# Altium PCB Diff-Probe.PcbDoc
Units mm, origin at the board's own origin, x right, y up, seen from the top; angles counter-clockwise.
Board outline 78 x 28 mm, 4 copper layers (Top Layer, MidLayer1, MidLayer2, Bottom Layer), stack 1.57 mm thick; 102 components, 41 nets, 248 pads, 67 vias.
Unrouted connection lines stored in the file: 2.
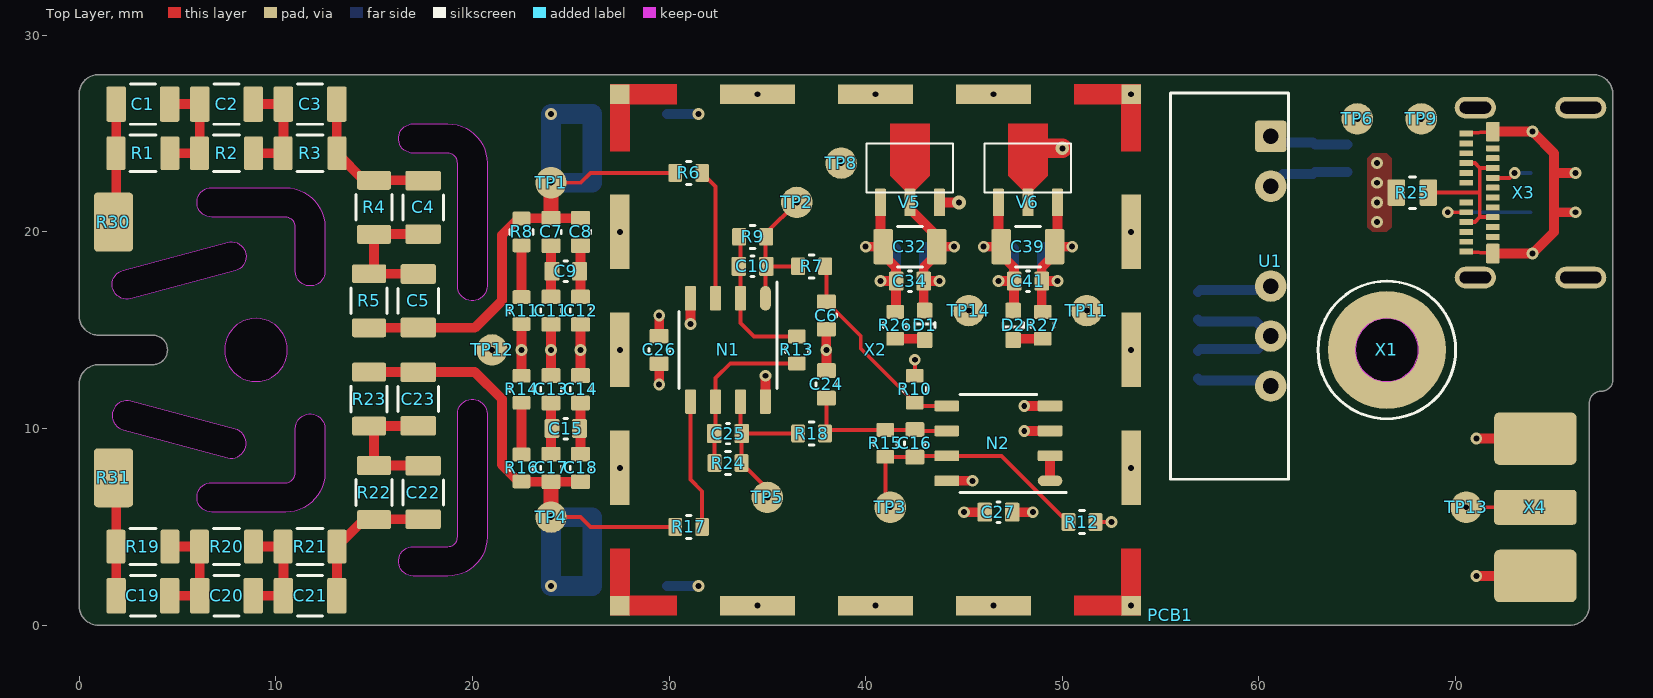
[diagram p0: Top Layer view]
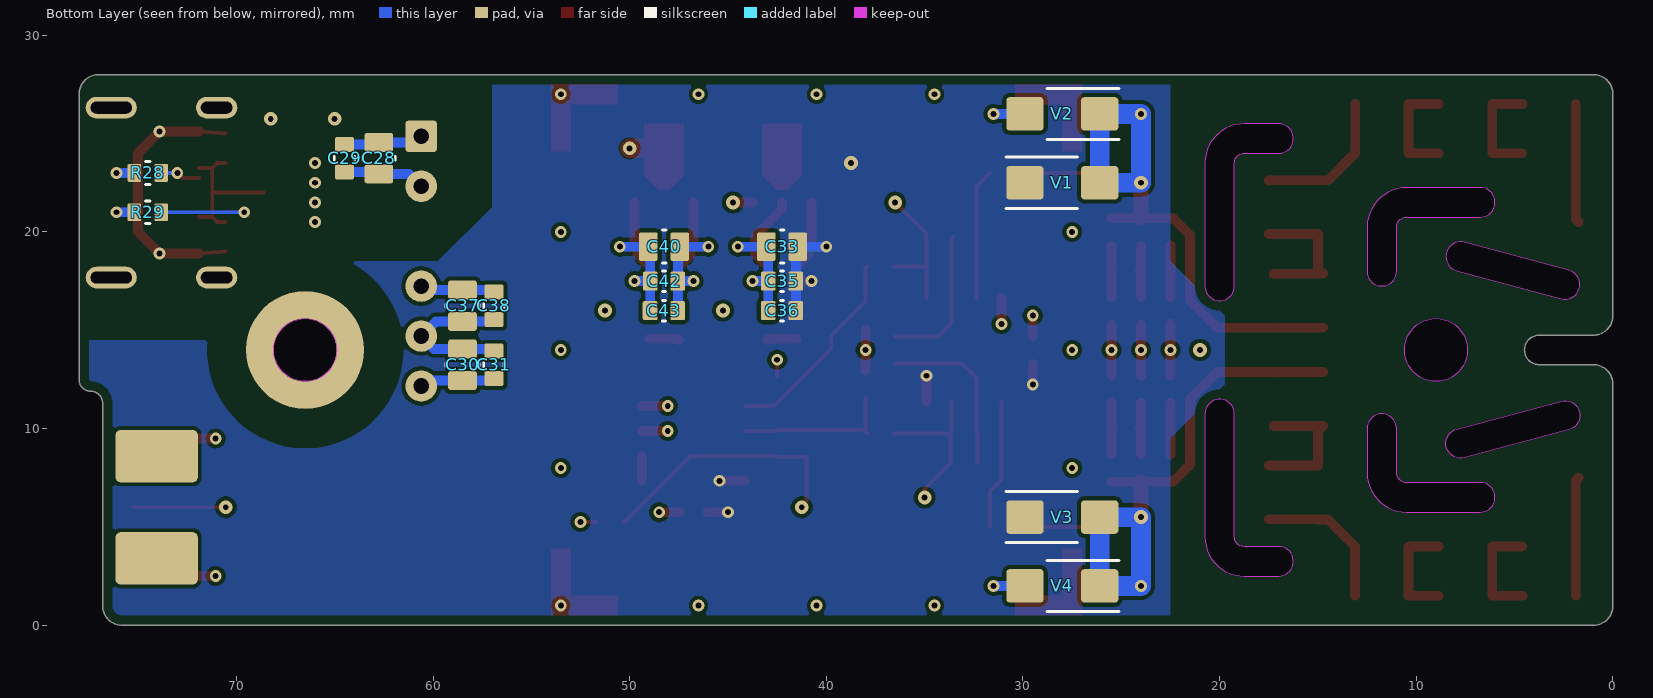
[diagram p1: Bottom Layer view, seen from below]
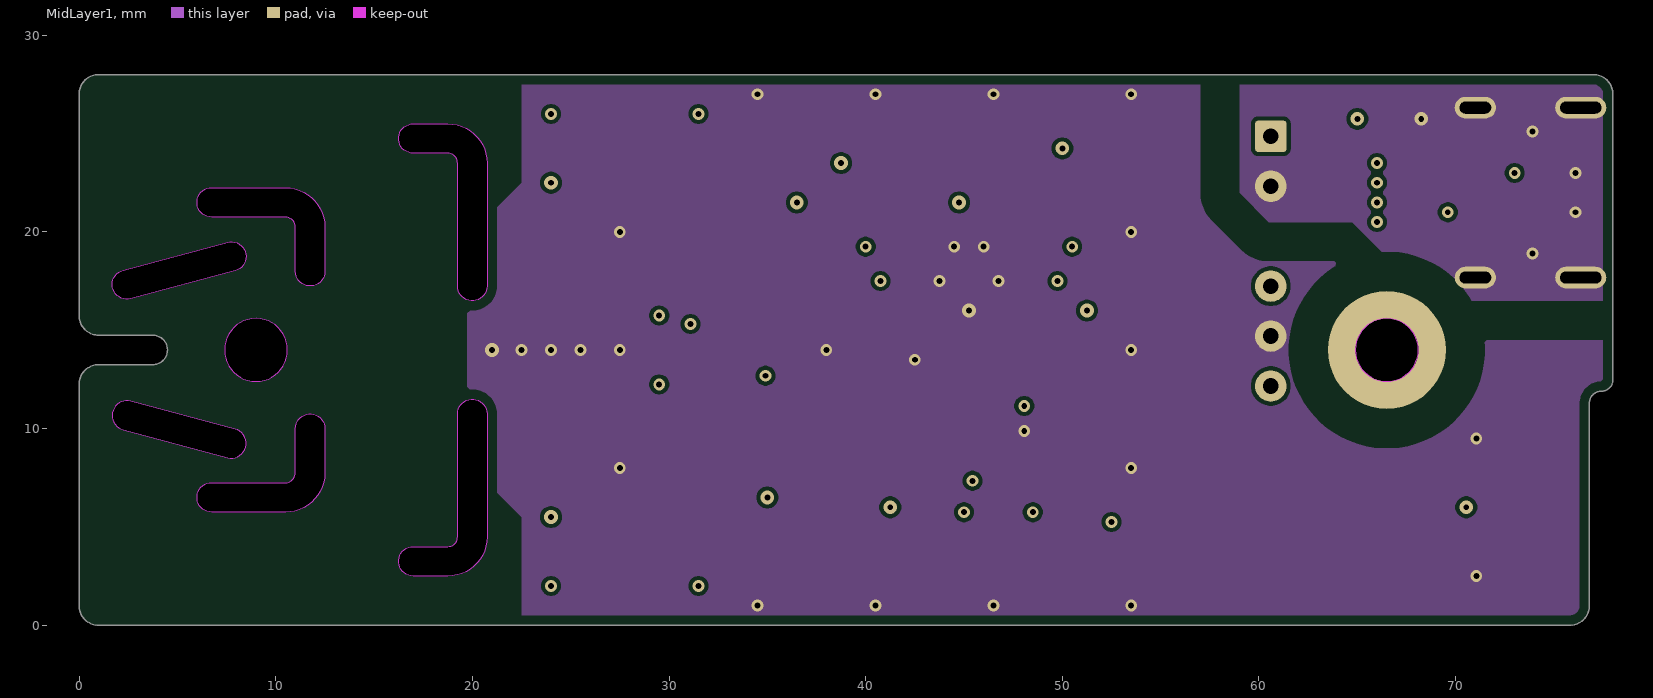
[diagram p2: MidLayer1]
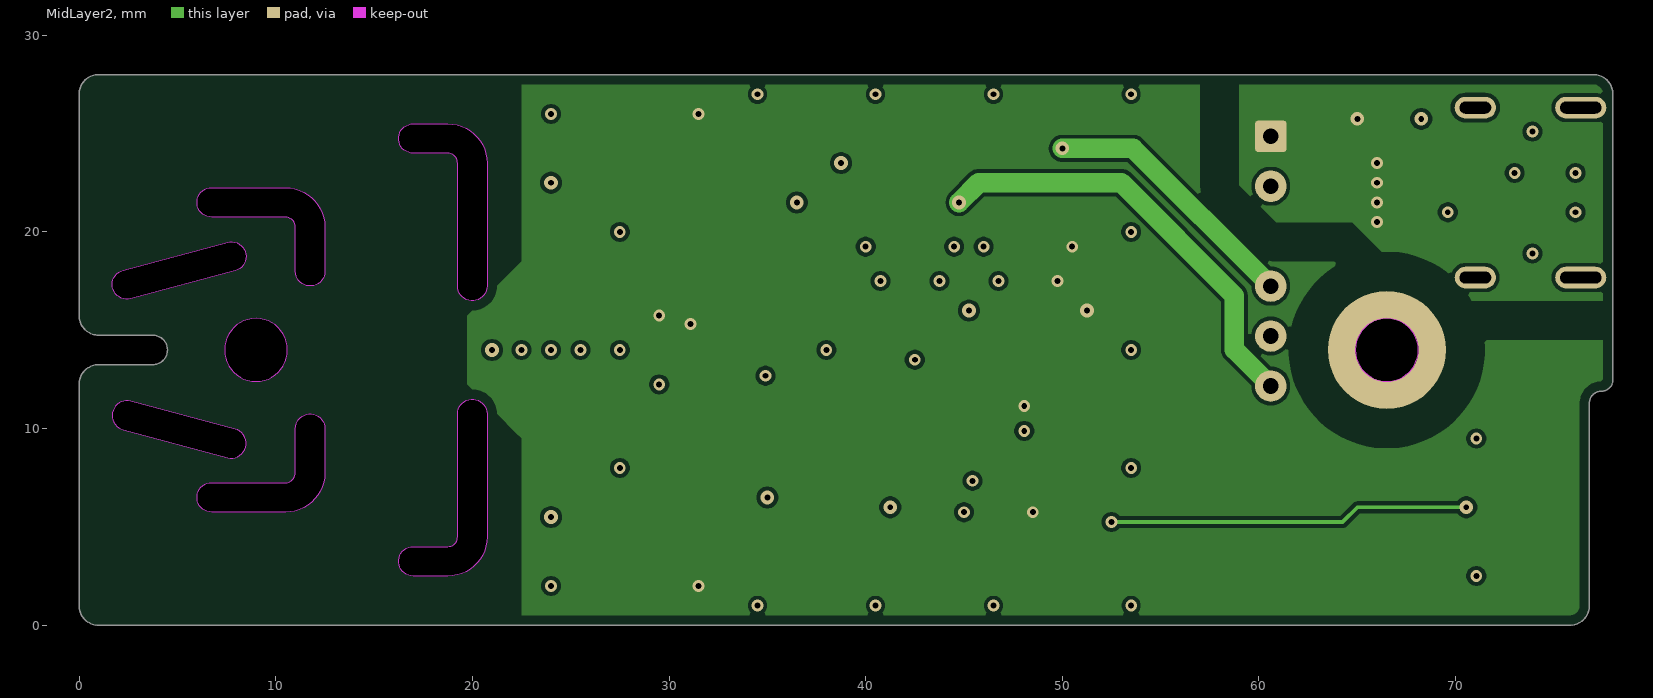
[diagram p3: MidLayer2]
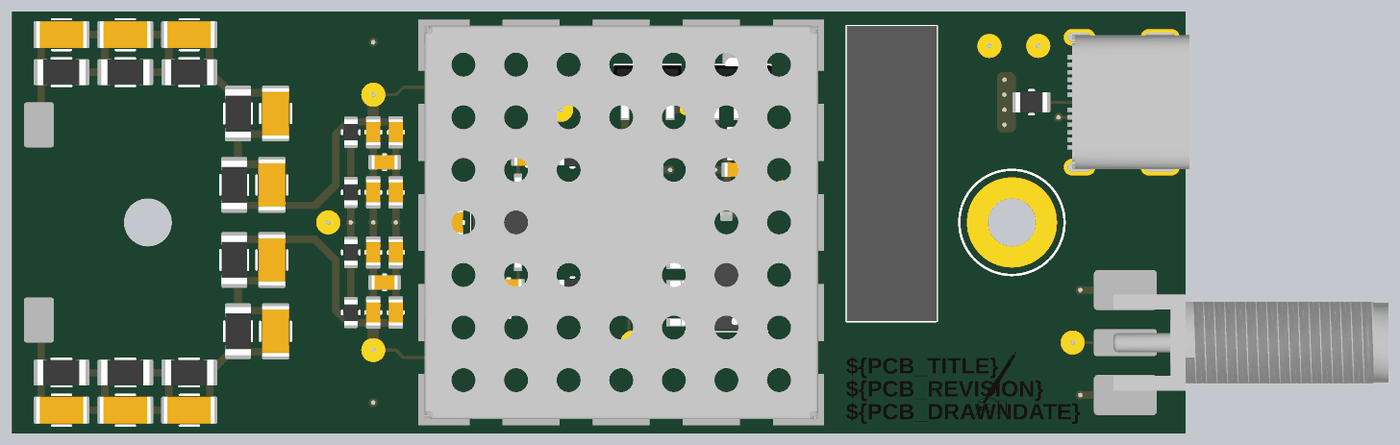
[diagram p4: 3D render of the assembled board from above, using the file's embedded part models]
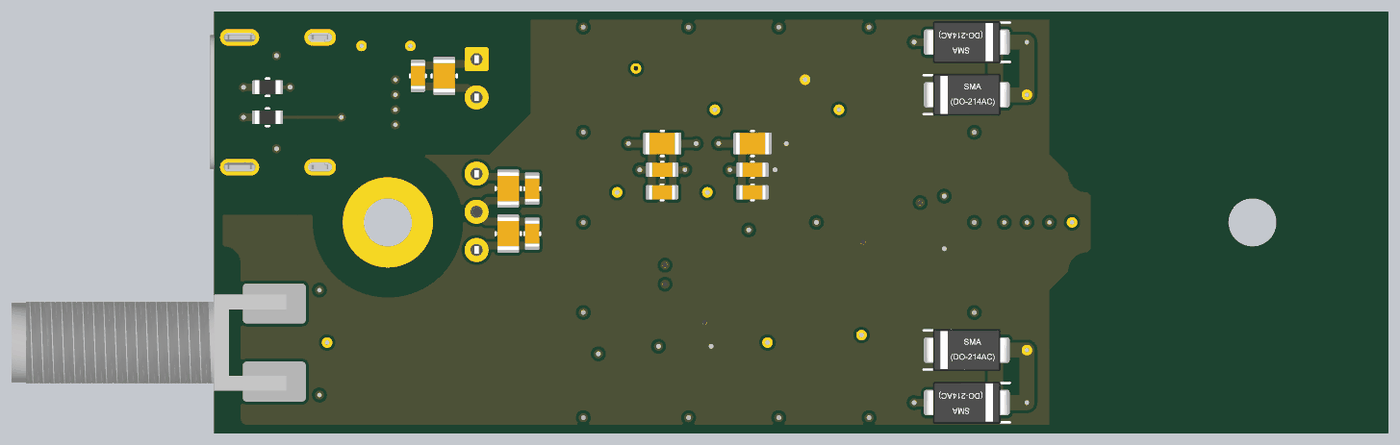
[diagram p5: 3D render of the assembled board from below, using the file's embedded part models]

## Layer stack, top to bottom
Top Solder: solder mask 0.01, Solder Resist, Dk 3.5
Top Layer: signal copper 0.035
Dielectric1: prepreg 0.18, FR-4 (7628), Dk 4.2
Dielectric 2: prepreg 0.18, FR-4 (7628), Dk 4.2
MidLayer1: signal copper 0.035
Core: core 0.71, Dk 4.2
MidLayer2: signal copper 0.035
Dielectric 3: prepreg 0.18, FR-4 (7628), Dk 4.2
Dielectric 4: prepreg 0.18, FR-4 (7628), Dk 4.2
Bottom Layer: signal copper 0.035
Bottom Solder: solder mask 0.01, Solder Resist, Dk 3.5

## Board outline
0,1 0,12.247 0,12.25 cw(c1,12.25) 1,13.25 1.003,13.25 3.75,13.25 ccw(c3.75,14) 3.75,14.75 1,14.75 cw(c1,15.75) 0,15.75 0,27 cw(c1,27) 1,28 77,28 cw(c77,27) 78,27 78,12.5 cw(c77.4,12.5) 77.4,11.9 ccw(c77.4,11.3) 76.8,11.3 76.8,1 cw(c75.8,1) 75.8,0 1.003,0 1,0 cw(c1,1)
cut-out: 7.4,14 ccw(c9,14) 9,12.4 ccw(c9,14) 10.6,14 ccw(c9,14) 9,15.6 ccw(c9,14)
cut-out: 64.9,14 ccw(c66.5,14) 66.5,12.4 ccw(c66.5,14) 68.1,14 ccw(c66.5,14) 66.5,15.6 ccw(c66.5,14)
cut-out: 17,2.5 cw(c17,3.25) 17,4 18.75,4 ccw(c18.75,4.5) 19.25,4.5 19.25,10.75 cw(c20,10.75) 20.75,10.75 20.75,4.5 cw(c18.75,4.5) 18.75,2.5
cut-out: 17,24 cw(c17,24.75) 17,25.5 18.75,25.5 cw(c18.75,23.5) 20.75,23.5 20.75,17.25 cw(c20,17.25) 19.25,17.25 19.25,23.5 ccw(c18.75,23.5) 18.75,24
cut-out: 2.632,16.602 cw(c2.437,17.326) 2.243,18.051 7.556,19.474 cw(c7.75,18.75) 7.944,18.026
cut-out: 2.243,9.949 7.556,8.526 ccw(c7.75,9.25) 7.944,9.974 2.632,11.398 ccw(c2.437,10.674)
cut-out: 6.75,5.75 cw(c6.75,6.5) 6.75,7.25 10.5,7.25 ccw(c10.5,7.75) 11,7.75 11,10 cw(c11.75,10) 12.5,10 12.5,7.75 cw(c10.5,7.75) 10.5,5.75
cut-out: 6.75,20.75 cw(c6.75,21.5) 6.75,22.25 10.5,22.25 cw(c10.5,20.25) 12.5,20.25 12.5,18 cw(c11.75,18) 11,18 11,20.25 ccw(c10.5,20.25) 10.5,20.75

## Design rules (kind name [scope] priority, off if disabled: settings)
AssemblyTestPointUsage [IsTestpoint] p1:
AssemblyTestpoint [IsTestpoint] p1: testpointundercomponent=TRUE minsize=0.8 maxsize=1.6 preferedsize=0.85 minholesize=0 maxholesize=0 preferedholesize=0 testpointgrid=0.025 usegrid=FALSE gridtolerance=0 allowsidetop=TRUE allowsidebottom=TRUE minspacing=2.54
BoardOutlineClearance [All and not OnLayer('Top Overlay')] p1: gap=0.5 ignorepadtopadclearanceinfootprint=FALSE except(0: Arc-SplitContinuation Track-SplitContinuation SMDPad-SplitContinuation Fill-SplitContinuation Poly-SplitContinuation Region-SplitContinuation Text-SplitContinuation; 1.5: THPad-SplitContinuation Via-SplitContinuation)
Clearance Clearance_Input [InNetClass('Input') vs all and not InNetClass('Input')] p1: gap=1.6 ignorepadtopadclearanceinfootprint=FALSE except(0: Arc-Hole Track-Hole SMDPad-Hole THPad-Hole Via-Hole Fill-Hole Poly-Hole Region-Hole Text-Hole)
Clearance Clearance_USB_Power [(InNetClass('Supply') or HasFootprint('A-MountingHole-0600x0600_0320')) and not HasFootprint('105450-0101') vs all and not InNetClass('Supply') and not HasFootprint('105450-0101')] p2: gap=2 ignorepadtopadclearanceinfootprint=FALSE
Clearance Clearance2Holes [not OnTopLayer AND NOT OnBottomLayer vs (ObjectKind = 'Pad') And (Layer = 'MultiLayer') And (PadIsPlated = 'False')] p3: gap=0.5 ignorepadtopadclearanceinfootprint=FALSE except(0: Arc-Hole Track-Hole SMDPad-Hole THPad-Hole Via-Hole Fill-Hole Poly-Hole Region-Hole Text-Hole)
Clearance Clearance_via2via [IsVia vs IsVia] p4: gap=0.15 ignorepadtopadclearanceinfootprint=FALSE
Clearance [All] p5: gap=0.2 ignorepadtopadclearanceinfootprint=FALSE except(0: Arc-Hole Track-Hole SMDPad-Hole THPad-Hole Via-Hole Fill-Hole Poly-Hole Region-Hole Text-Hole)
ComponentClearance [IsComponent] p1: gap=0.254 collisioncheckmode=3 verticalgap=0.254 showdistances=TRUE donotcheckwithout3dbody=TRUE
FabricationTestPointUsage [IsTestpoint] p1: valid=0 allowmultiple=FALSE
FabricationTestpoint [IsTestpoint] p1: side=3 testpointundercomponent=TRUE minsize=0.8 maxsize=1.6 preferedsize=0.85 minholesize=0 maxholesize=0 preferedholesize=0 testpointgrid=0.025 allowsidetop=TRUE allowsidebottom=TRUE usegrid=FALSE gridtolerance=0 minspacing=2.54 boardedgeclearance=1.9
HoleSize [All] p1: absolutevalues=TRUE maxlimit=6.4 minlimit=0.2 maxpercent=80.000 minpercent=20.000
MinimumAnnularRing MinimumAnnularRingVia [IsVia] p1: minimumring=0.15
MinimumAnnularRing MinimumAnnularRingDefault [All] p2: minimumring=0.15
MinimumSolderMaskSliver MinimumSolderMaskSliver_Symbols [IsComponent] p1: minsoldermaskwidth=0
MinimumSolderMaskSliver [All and not HasFootprint('105450-0101')] p2: minsoldermaskwidth=0.1
PlaneClearance PlaneClearance_PE [InNet('EARTH_USB')  or InNet('EARTH_G2') or InNet('NetC3_2') or InNet('EARTH')] p1: clearance=1
PlaneClearance PlaneClearance_Holes-via [(IsVia)] p2: clearance=0.35
PlaneClearance PlaneClearance_Holes-Special [(InComponentClass('SpecialConnector'))] p3: clearance=0.35
PlaneClearance [All] p4: clearance=0.5
PlaneConnect "PlaneConnect_Special Con" [(InComponentClass('SpecialConnector'))] p1: planeconnectstyle=Direct reliefexpansion=0.508 reliefentries=4 reliefconductorwidth=0.254 reliefairgap=0.254
PlaneConnect PlaneConnect_Components [(InComponentClass('All Components'))] p2: planeconnectstyle=Relief reliefexpansion=0.35 reliefentries=4 reliefconductorwidth=0.25 reliefairgap=0.25
PlaneConnect [All] p3: planeconnectstyle=Direct reliefexpansion=0.508 reliefentries=4 reliefconductorwidth=0.254 reliefairgap=0.254
PolygonConnect PolygonConnect_Components [HasFootprint('5-1814400-2')] p1: connectstyle=Relief reliefconductorwidth=0.254 reliefentries=4 polygonreliefangle="90 Angle" airgapwidth=0.254
PolygonConnect [All] p2: connectstyle=Direct reliefconductorwidth=0.254 reliefentries=4 polygonreliefangle="90 Angle" airgapwidth=0.254
RoutingVias Micro-Vias [((ObjectKind = 'Via') AND (StartLayer = 'Top Layer') AND (StopLayer = 'InternalPlane1')) OR ((ObjectKind = 'Via') AND (StartLayer = 'Bottom Layer') AND (StopLayer = 'InternalPlane2'))] p1: holewidth=0.15 width=0.35 viastyle="Through Hole" minholewidth=0.15 minwidth=0.35 maxholewidth=0.15 maxwidth=0.35
RoutingVias [All] p2: holewidth=0.2 width=0.55 viastyle="Through Hole" minholewidth=0.2 minwidth=0.55 maxholewidth=0.3 maxwidth=0.7
SilkToSilkClearance [All] p1: silktosilkclearance=0.2
SilkToSolderMaskClearance SilkToPadClearance [IsPad] p1: minsilkscreentomaskgap=0.2 clearancetoexposedcopper=TRUE
SolderMaskExpansion SolderMaskExpansionVias [IsVia] p1: expansion=0.15 istentingtop=FALSE soldermaskfromhole=TRUE
SolderMaskExpansion SolderMaskExpansionHoles [(ObjectKind = 'Pad') And (PadIsPlated = 'False') And (AsMM(PadXSize_AllLayers) = 0) And (AsMM(PadYSize_AllLayers) = 0)] p2: expansion=0.05 istentingtop=FALSE soldermaskfromhole=TRUE
SolderMaskExpansion SolderMaskExpansionSTD [IsPad  Or IsRegion] p3: expansion=0.05 istentingtop=FALSE
ViasUnderSMD ViasUnderSMD_TP [HasFootprint('TP_1.0mm') or HasFootprint('TP_1.6mm_via') or HasFootprint('BMI-S-103')] p1: allowed=TRUE
ViasUnderSMD [All] p2: allowed=FALSE
Width [All] p1: maxlimit=2 minlimit=0.15 preferedwidth=0.2 minimp=50.000000 maximp=50.000000 favimp=50.000000
19 further rules are at their usual default settings.

## Classes and differential pairs
component class Symbol: PCB1
net class Business-End: NetC1_1 NetC1_2 NetC2_2 NetC3_2 NetC4_2 NetC19_1 NetC19_2 NetC20_2 NetC21_2 NetC22_2
net class Supply: 5V_USB 5Vin GND_USB NetR28_2 NetR29_2 NetX3_A2 NetX3_A3 NetX3_A6 NetX3_A7 NetX3_A8 NetX3_A10 NetX3_A11 NetX3_B2 NetX3_B3 NetX3_B6 NetX3_B7 NetX3_B8 NetX3_B10 NetX3_B11
component class "Surface_Assy ": X2
component class Through-Hole_Assy: U1 X3 X4
component class Testpoint: R30 R31 TP1 TP2 TP3 TP4 TP5 TP6 TP8 TP9 TP11 TP12 TP13 TP14 X1
component class Surface_Assy: C1 C2 C3 C4 C5 C6 C7 C8 C9 C10 C11 C12 C13 C14 C15 C16 C17 C18 C19 C20 C21 C22 C23 C24 C25 C26 C27 C28 C29 C30 C31 C32 C33 C34 C35 C36 C37 C38 C39 C40 C41 C42 C43 D1 D2 N1 N2 R1 R2 R3 R4 R5 R6 R7 R8 R9 R10 R11 R12 R13 R14 R15 R16 R17 R18 R19 R20 R21 R22 R23 R24 R25 R26 R27 R28 R29 V1 V2 V3 V4 V5 V6
component class Diff-Probe-Supply: C28 C29 C30 C31 C32 C33 C34 C35 C36 C37 C38 C39 C40 C41 C42 C43 D1 D2 R25 R26 R27 R28 R29 TP6 TP8 TP9 TP11 TP14 U1 V5 V6 X3

## Components (designator, comment, footprint, x,y, rotation, side; value= is the part's Value field where it differs from the comment)
C1 "CAP 10PF 1KV U2J 1206" C-1206_3216_100_L_RF 3.25,26.5 r0 top value=10pF
C2 "CAP 10PF 1KV U2J 1206" C-1206_3216_100_L_RF 7.5,26.5 r0 top value=10pF
C3 "CAP 10PF 1KV U2J 1206" C-1206_3216_100_L_RF 11.75,26.5 r0 top value=10pF
C4 "CAP 10PF 1KV U2J 1206" C-1206_3216_100_L_RF 17.5,21.25 r270 top value=10pF
C5 "CAP 10PF 1KV U2J 1206" C-1206_3216_100_L_RF 17.25,16.5 r270 top value=10pF
C6 "Cap 1n 0603" C-0603_1608_100_L_RF 38,15.75 r90 top value=1nF
C7 "Cap 10p 0603" C-0603_1608_095_L_RF 24,20 r90 top value=10pF
C8 "Cap 470p 0603" C-0603_1608_095_L_RF 25.5,20 r90 top value=470pF
C9 "Cap 0603" C-0603_1608_095_L_RF 24.75,18 r180 top
C10 "Cap 22p 0603" C-0603_1608_095_L_RF 34.25,18.25 r0 top value=22pF
C11 "Cap 10p 0603" C-0603_1608_095_L_RF 24,16 r90 top value=10pF
C12 "Cap 330p 0603" C-0603_1608_095_L_RF 25.5,16 r90 top value=330pF
C13 "Cap 10p 0603" C-0603_1608_095_L_RF 24,12 r90 top value=10pF
C14 "Cap 330p 0603" C-0603_1608_095_L_RF 25.5,12 r90 top value=330pF
C15 "Cap 0603" C-0603_1608_095_L_RF 24.75,10 r180 top
C16 "Cap 22p 0603" C-0603_1608_095_L_RF 42.5,9.25 r270 top value=22pF
C17 "Cap 10p 0603" C-0603_1608_095_L_RF 24,8 r90 top value=10pF
C18 "Cap 470p 0603" C-0603_1608_095_L_RF 25.5,8 r90 top value=470pF
C19 "CAP 10PF 1KV U2J 1206" C-1206_3216_100_L_RF 3.25,1.5 r0 top value=10pF
C20 "CAP 10PF 1KV U2J 1206" C-1206_3216_100_L_RF 7.5,1.5 r0 top value=10pF
C21 "CAP 10PF 1KV U2J 1206" C-1206_3216_100_L_RF 11.75,1.5 r0 top value=10pF
C22 "CAP 10PF 1KV U2J 1206" C-1206_3216_100_L_RF 17.5,6.75 r90 top value=10pF
C23 "CAP 10PF 1KV U2J 1206" C-1206_3216_100_L_RF 17.25,11.5 r90 top value=10pF
C24 "Cap 1n 0603" C-0603_1608_100_L_RF 38,12.25 r270 top value=1nF
C25 "Cap 22p 0603" C-0603_1608_095_L_RF 33,9.75 r0 top value=22pF
C26 "Cap 100n 0603" C-0603_1608_095_L_RF 29.5,14 r270 top value=100nF
C27 "Cap 100n 0603" C-0603_1608_095_L_RF 46.75,5.75 r180 top value=100nF
C28 "Cap 10u 0805" C-0805_2012_155_L_RF 62.75,23.75 r90 bottom value=10µF
C29 "Cap 100n 0603" C-0603_1608_095_L_RF 64.5,23.75 r90 bottom value=100nF
C30 "Cap 10u 0805" C-0805_2012_155_L_RF 58.5,13.25 r270 bottom value=10µF
C31 "Cap 100n 0603" C-0603_1608_095_L_RF 56.9,13.25 r270 bottom value=100nF
C32 "Cap 100u 6.3V 1206" C-1206_3216_180_L_RF 42.25,19.25 r0 top value=100µF
C33 "Cap 10u 0805" C-0805_2012_155_L_RF 42.25,19.25 r180 bottom value=10µF
C34 "Cap 100n 0603" C-0603_1608_095_L_RF 42.25,17.5 r180 top value=100nF
C35 "Cap 1n 0603" C-0603_1608_100_L_RF 42.25,17.5 r180 bottom value=1nF
C36 "Cap 100p 0603" C-0603_1608_095_L_RF 42.25,16 r180 bottom value=100pF
C37 "Cap 10u 0805" C-0805_2012_155_L_RF 58.5,16.25 r270 bottom value=10µF
C38 "Cap 100n 0603" C-0603_1608_095_L_RF 56.9,16.25 r270 bottom value=100nF
C39 "Cap 100u 6.3V 1206" C-1206_3216_180_L_RF 48.25,19.25 r0 top value=100µF
C40 "Cap 10u 0805" C-0805_2012_155_L_RF 48.25,19.25 r180 bottom value=10µF
C41 "Cap 100n 0603" C-0603_1608_095_L_RF 48.25,17.5 r180 top value=100nF
C42 "Cap 1n 0603" C-0603_1608_100_L_RF 48.25,17.5 r180 bottom value=1nF
C43 "Cap 100p 0603" C-0603_1608_095_L_RF 48.26,16 r180 bottom value=100pF
D1 "LED SMD 0603 Green" LED-0603_1608_Green_L_RF 43,15.25 r90 top value=green
D2 "LED SMD 0603 Green" LED-0603_1608_Green_L_RF 47.5,15.25 r270 top value=green
N1 "TL072ID" SO8_L_RF 33,14 r180 top
N2 "TL072ID" SO8_L_RF 46.75,9.25 r90 top
PCB1 "PCB_Dummy" Dummy_PCB-Parameter_SM 55.5,0.5 r0 top value="- / A"
R1 "Res 1M 1206" R-1206_3216_065_L_RF 3.25,24 r0 top value=1M
R2 "Res 1M 1206" R-1206_3216_065_L_RF 7.5,24 r0 top value=1M
R3 "Res 1M 1206" R-1206_3216_065_L_RF 11.75,24 r0 top value=1M
R4 "Res 1M 1206" R-1206_3216_065_L_RF 15,21.25 r270 top value=1M
R5 "Res 1M 1206" R-1206_3216_065_L_RF 14.75,16.5 r270 top value=1M
R6 "Res 100R 0603" R-0603_1608_050_L_RF 31,23 r0 top value=100
R7 "Res 1k 0603" R-0603_1608_050_L_RF 37.25,18.25 r0 top value=1k
R8 "Res 47k 0603" R-0603_1608_050_L_RF 22.5,20 r90 top value=47k
R9 "Res 1k 0603" R-0603_1608_050_L_RF 34.25,19.75 r0 top value=1k
R10 "Res 1k 0603" R-0603_1608_050_L_RF 42.5,12 r90 top value=1k
R11 "Res 3k3 0603" R-0603_1608_050_L_RF 22.5,16 r90 top value=3.3k
R12 "Res 47R 0603" R-0603_1608_050_L_RF 51,5.25 r0 top value=47
R13 "Res 0603" R-0603_1608_050_L_RF 36.5,14 r90 top
R14 "Res 3k3 0603" R-0603_1608_050_L_RF 22.5,12 r90 top value=3.3k
R15 "Res 1k 0603" R-0603_1608_050_L_RF 41,9.25 r270 top value=1k
R16 "Res 47k 0603" R-0603_1608_050_L_RF 22.5,8 r90 top value=47k
R17 "Res 100R 0603" R-0603_1608_050_L_RF 31,5 r0 top value=100
R18 "Res 1k 0603" R-0603_1608_050_L_RF 37.25,9.75 r0 top value=1k
R19 "Res 1M 1206" R-1206_3216_065_L_RF 3.25,4 r0 top value=1M
R20 "Res 1M 1206" R-1206_3216_065_L_RF 7.5,4 r0 top value=1M
R21 "Res 1M 1206" R-1206_3216_065_L_RF 11.75,4 r0 top value=1M
R22 "Res 1M 1206" R-1206_3216_065_L_RF 15,6.75 r90 top value=1M
R23 "Res 1M 1206" R-1206_3216_065_L_RF 14.75,11.5 r90 top value=1M
R24 "Res 1k 0603" R-0603_1608_050_L_RF 33,8.25 r0 top value=1k
R25 "Res 0R 0805" R-0805_2012_060_L_RF 67.8,22 r180 top value=0R
R26 "Res 1k 0603" R-0603_1608_050_L_RF 41.5,15.25 r90 top value=1k
R27 "Res 1k 0603" R-0603_1608_050_L_RF 49,15.25 r270 top value=1k
R28 "Res 5k1 0603" R-0603_1608_050_L_RF 74.5,23 r180 bottom value=5.1k
R29 "Res 5k1 0603" R-0603_1608_050_L_RF 74.5,21 r180 bottom value=5.1k
R30 "" Lötpad_2x3 1.75,20.5 r0 top
R31 "" Lötpad_2x3 1.75,7.5 r0 top
TP1 "TestPoint 1.6mm with via" TP_1.6mm_via 24,22.5 r0 top value=TP
TP2 "TestPoint 1.6mm with via" TP_1.6mm_via 36.5,21.5 r0 top value=TP
TP3 "TestPoint 1.6mm with via" TP_1.6mm_via 41.25,6 r0 top value=TP
TP4 "TestPoint 1.6mm with via" TP_1.6mm_via 24,5.5 r0 top value=TP
TP5 "TestPoint 1.6mm with via" TP_1.6mm_via 35,6.5 r0 top value=TP
TP6 "TestPoint 1.6mm with via" TP_1.6mm_via 65,25.75 r0 top value=TP
TP8 "TestPoint 1.6mm with via" TP_1.6mm_via 38.75,23.5 r0 top value=TP
TP9 "TestPoint 1.6mm with via" TP_1.6mm_via 68.25,25.75 r0 top value=TP
TP11 "TestPoint 1.6mm with via" TP_1.6mm_via 51.25,16 r0 top value=TP
TP12 "TestPoint 1.6mm with via" TP_1.6mm_via 21,14 r0 top value=TP
TP13 "TestPoint 1.6mm with via" TP_1.6mm_via 70.54,6 r90 top value=TP
TP14 "TestPoint 1.6mm with via" TP_1.6mm_via 45.25,16 r0 top value=TP
U1 "IA0509S" SIP7 58.5,17.25 r270 top
V1 "SS14-E3" SMA_DO214AC_L_RF 28,22.5 r0 bottom value=40V
V2 "SS14-E3" SMA_DO214AC_L_RF 28,26 r180 bottom value=40V
V3 "SS14-E3" SMA_DO214AC_L_RF 28,5.5 r0 bottom value=40V
V4 "SS14-E3" SMA_DO214AC_L_RF 28,2 r180 bottom value=40V
V5 "L78L05" SOT-89-3 42.25,23 r0 top
V6 "L79L05" SOT-89-3 48.25,23 r0 top
X1 "AnschlussPad_D3.2_P6mm" A-MountingHole-0600x0600_0320 66.5,14 r0 top
X2 "BMI-S-103" BMI-S-103 40.5,14 r0 top locked
X3 "105450-0101" 105450-0101 71,22 r90 top locked
X4 "73251-2120" 73251-2120 74.05,6 r270 top

## Footprints (in the part's own frame and the unit in brackets; to place one, negate y for a bottom-side part, rotate by r counter-clockwise, add the part's x,y. Pads: shape width x height; smd on the part's side, far side on the other; paste and mask are expansions set on the pad)
73251-2120 [mm] "SMA Connector"
  rrect20% 1.78x4.19 smd: 1(0,0)
  rrect20% 2.665x4.19 smd: 2(-3.492,0) 2(3.492,0)
  rrect20% 2.665x4.19 smd far side: 2(-2.6,0) 2(2.6,0)
  body extent -3.2,-0.8 3.2,17.5, height 3.9
105450-0101 [mm] "USB-C Connector"
  rrect20% 0.3x0.7 smd: A1(-3,0.46) A2(-2.5,0.46) A3(-2,0.46) A4(-1.5,0.46) A5(-1,0.46) A6(-0.5,0.46) A7(0.5,0.46) A8(1,0.46) A9(1.5,0.46) A10(2,0.46) A11(2.5,0.46) A12(3,0.46) B2(2.25,-0.89) B3(1.75,-0.89) B4(1.25,-0.89) B5(0.75,-0.89) B6(0.25,-0.89) B7(-0.25,-0.89) B8(-0.75,-0.89) B9(-1.25,-0.89) B10(-1.75,-0.89) B11(-2.25,-0.89)
  rrect20% 1x0.7 smd: B1(3.1,-0.89) B12(-3.1,-0.89)
  oval 1.1x2.6 hole 0.6 slot 2.1 at 90 deg: S(-4.32,-5.36) S(4.32,-5.36)
  oval 1.1x2.1 hole 0.6 slot 1.6 at 90 deg: S(-4.32,0) S(4.32,0)
  body extent -4.47,-7.3 4.47,0.6, height 3.18
A-MountingHole-0600x0600_0320 [mm] "MountigHole"
  round 6 hole 3.2: 1(0,0)
  silkscreen extent -3.5,-3.5 3.5,3.5
BMI-S-103 [mm] "EMI Shield"
  rect 1x1 smd: S(-13,-13) S(-13,13) S(13,-13) S(13,13)
  rect 1x3.79 smd: S(-13,-6) S(-13,0) S(-13,6) S(13,-6) S(13,0) S(13,6)
  rect 3.79x1 smd: S(-6,-13) S(-6,13) S(0,-13) S(0,13) S(6,-13) S(6,13)
  Top Layer region: -13.5,13.5 -10.1,13.5 -10.1,12.5 -12.5,12.5 -12.5,10.1 -13.5,10.1
  Top Layer region: -13.5,-13.5 -13.5,-10.1 -12.5,-10.1 -12.5,-12.5 -10.1,-12.5 -10.1,-13.5
  Top Layer region: 13.5,-13.5 10.1,-13.5 10.1,-12.5 12.5,-12.5 12.5,-10.1 13.5,-10.1
  Top Layer region: 13.5,13.5 13.5,10.1 12.5,10.1 12.5,12.5 10.1,12.5 10.1,13.5
  body extent -13.11,-13.11 13.11,13.11, height 5.1
C-0603_1608_095_L_RF [mm] "Capacitor Chip 0603 Reflow; IPC7351C; Least; A.0"
  rrect20% 0.75x0.96 smd: 1(-0.7,0) 2(0.7,0)
  silkscreen extent -0.08,-0.52 0.08,0.52, body extent -0.87,-0.48 0.88,0.48, height 0.95
C-0603_1608_100_L_RF [mm] "Capacitor Chip 0603 Reflow; IPC7351C; Least; A.0"
  rrect20% 0.75x0.96 smd: 1(-0.7,0) 2(0.7,0)
  silkscreen extent -0.08,-0.52 0.08,0.52, body extent -0.87,-0.48 0.88,0.48, height 1
C-0805_2012_155_L_RF [mm] "Capacitor Chip 0805 Reflow; IPC7351C; Least; A.0"
  rrect20% 0.95x1.45 smd: 1(-0.8,0) 2(0.8,0)
  silkscreen extent -0.09,-0.83 0.09,0.84, body extent -1.1,-0.72 1.11,0.73, height 1.55
C-1206_3216_100_L_RF [mm] "Capacitor Chip 1206 Reflow; IPC7351C; Least; A.1"
  rrect20% 1x1.8 smd: 1(-1.36,0) 2(1.36,0)
  silkscreen extent -0.63,-1.02 0.63,1.02, body extent -1.7,-0.9 1.7,0.9, height 1
C-1206_3216_180_L_RF [mm] "Capacitor Chip 1206 Reflow; IPC7351C; Least; A.1"
  rrect20% 1x1.8 smd: 1(-1.36,0) 2(1.36,0)
  silkscreen extent -0.63,-1.02 0.63,1.02, body extent -1.7,-0.9 1.7,0.9, height 1.8
Dummy_PCB-Parameter_SM [mm] "Footprint of PCB Dummy Symbol"
LED-0603_1608_Green_L_RF [mm] "LED Chip 0603 Reflow_Green, LTST-C190KGKT"
  rrect20% 0.8x0.8 smd: 1(-0.75,0) 2(0.75,0)
  silkscreen extent -0.14,-0.52 0.14,0.52, body extent -0.81,-0.4 0.81,0.4, height 0.75
Lötpad_2x3 [mm]
  rrect20% 2x3 smd: 1(0,0)
R-0603_1608_050_L_RF [mm] "Resistor Chip 0603 Reflow; IPC7351C; Least; A.1"
  rrect20% 0.7x0.9 smd: 1(-0.685,0) 2(0.685,0)
  silkscreen extent -0.12,-0.58 0.12,0.58, body extent -0.85,-0.45 0.85,0.45, height 0.5
R-0805_2012_060_L_RF [mm] "Resistor Chip 0805 Reflow; IPC7351C; Least; A.1"
  rrect20% 0.89x1.35 smd: 1(-0.815,0) 2(0.815,0)
  silkscreen extent -0.16,-0.8 0.16,0.8, body extent -1.05,-0.67 1.05,0.68, height 0.6
R-1206_3216_065_L_RF [mm] "Resistor Chip 1206 Reflow; IPC7351C; Least; A.1"
  rrect20% 0.96x1.72 smd: 1(-1.375,0) 2(1.375,0)
  silkscreen extent -0.65,-0.92 0.65,0.92, body extent -1.6,-0.85 1.6,0.85, height 0.65
SIP7 [mm] "7 PIN SIP Package"
  rrect20% 1.6x1.6 hole 0.8: 1(-7.615,2.1)
  round 1.6 hole 0.8: 2(-5.075,2.1) 4(0.005,2.1) 5(2.545,2.1) 6(5.085,2.1)
  silkscreen extent -9.83,-3 9.83,3, body extent -9.83,-3 9.83,3, height 10.16
SMA_DO214AC_L_RF [mm]
  rrect20% 1.9x1.7 smd: 1(-1.9,0) 2(1.9,0)
  silkscreen extent -0.77,-1.31 2.87,1.3, body extent -2.75,-1.4 2.75,1.4, height 2.6
SO8_L_RF [mm] "SOIC, 8-Leads, Body 4.89x3.90mm, Pitch 1.27mm, IPC High Density"
  oval 0.55x1.25 smd: 1(-1.905,-2.625)
  rrect20% 0.55x1.25 smd: 2(-0.635,-2.625) 3(0.635,-2.625) 4(1.905,-2.625) 5(1.905,2.625) 6(0.635,2.625) 7(-0.635,2.625) 8(-1.905,2.625)
  silkscreen extent -2.49,-3.45 2.49,1.95, body extent -2.5,-3 2.5,3, height 1.75
SOT-89-3 [mm]
  rrect20% 0.57x1.4 smd: 1(-1.5,-1.5) 2(0,-1.5) 3(1.5,-1.5)
  Top Layer region: -0.285,-0.857 -1,-0.142 -1,2.5 1,2.5 1,-0.142 0.285,-0.857
  silkscreen extent -2.2,-1 2.2,1.5, body extent -2.25,-2.05 2.25,1.95, height 1.6
TP_1.6mm_via [mm] "Testpoint 1.6mm with via v70h30"
  round 1.6 smd paste-1: 1(0,0)

## Part data
C1 C2 C3 C4 C5 C19 C20 C21 C22 C23: library part CMP-00003-1, "CAP CER 10PF 1KV U2J 1206", Case/Package=1206, ClassName=Surface_Assy, Footprint_validated=Yes, Part="Cap Dummy", Part_validated=Yes, PartStatus=New, Prefered=False, System=-, Technology=SMT, Type=C, User=zupa
C6 C24 C35 C42: library part CMP-001-0174-2, "Cap Cer SMD 1n 50V 1% 0603 C0G", Case / Package=0603, Manufacturer=AVX, Manufacturer Part Number=06035A102FAT*, ClassName=Surface_Assy, ComponentLink1Description=Datasheet, ComponentLink1URL=https://datasheet.ciiva.com/26939/getdatasheetpartid-734047-26939692.pdf, GPV_Number=1749.0018, PartStatus=Release, Prefered=true, Technology=SMT, User=zupa
C7 C11 C13 C17: library part CMP-001-0041-2, "Cap Cer SMD 10p 50V +/- 0.25pF  0603 C0G", Case / Package=0603, Manufacturer=AVX, Manufacturer Part Number=06035A100CAT*, ClassName=Surface_Assy, ComponentLink1Description=Datasheet, ComponentLink1URL=https://datasheet.ciiva.com/11464/ccog-11464569.pdf, GPV_Number=1749.0090, PartStatus=Release, Prefered=true, Technology=SMT, User=zupa
C8 C18: library part CMP-001-0054-2, "Cap Cer SMD 470p 100V 10% 0603 X7R", Case / Package=0603, Manufacturer=AVX, Manufacturer Part Number=06031C471KAT2A, ClassName=Surface_Assy, ComponentLink1Description=Datasheet, ComponentLink1URL=https://datasheet.ciiva.com/150/cx7r-150686.pdf, GPV_Number=1749.0037, PartStatus=Release, Prefered=true, Technology=SMT, User=zupa
C9 C15: library part CMP-001-0113-2, "Cap Cer SMD ?n ?V ?% 0603 ?", Case / Package=0603, Manufacturer=?, ClassName=Surface_Assy, GPV_Number=?, Manufacturer Part Number=?, PartStatus=Release, Technology=SMT, User=zupa
C10 C16 C25: library part CMP-001-0048-2, "Cap Cer SMD 22p 50V 5% 0603 C0G", Case / Package=0603, Manufacturer=AVX, Manufacturer Part Number=06035A220JAT, ClassName=Surface_Assy, ComponentLink1Description=Datasheet, ComponentLink1URL=https://datasheet.ciiva.com/11464/ccog-11464569.pdf, GPV_Number=1749.0023, PartStatus=Release, Prefered=true, Technology=SMT, User=zupa
C12 C14: library part CMP-001-0004-2, "Cap Cer SMD 330p 50V 2% 0603 C0G", Case / Package=0603, Manufacturer=MURATA, Manufacturer Part Number=GRM1885C1H331GA01D, ClassName=Surface_Assy, ComponentLink1Description=Datasheet, ComponentLink1URL=https://datasheet.ciiva.com/29538/grm1885c1h331ga01-01-29538011.pdf, GPV_Number=1749.0120, PartStatus=Release, Prefered=true, Technology=SMT, User=zupa
C26 C27 C29 C31 C34 C38 C41: library part CMP-001-0036-2, "Cap Cer SMD 100n 100V 10% 0603 X7R", Case / Package=0603, Manufacturer=MURATA, Manufacturer Part Number=GRM188R72A104KA35, ClassName=Surface_Assy, ComponentLink1Description=Datasheet, ComponentLink1URL=https://datasheet.ciiva.com/34302/1857815-34302863.pdf, GPV_Number=1749.0196, PartStatus=Release, Prefered=false, Technology=SMT, User=zupa
C28 C30 C33 C37 C40: library part CMP-001-0018-2, "Cap Cer SMD 10u 6.3V 10% 0805 X7R", Case / Package=0805, Manufacturer=MURATA, Manufacturer Part Number=GCM21BR70J106KE22, ClassName=Surface_Assy, ComponentLink1Description=Datasheet, ComponentLink1URL=https://datasheet.ciiva.com/11607/product-11607500.pdf, GPV_Number=1750.0267, PartStatus=Release, Prefered=false, Technology=SMT, User=zupa
C32 C39: library part CMP-00025-1, "Cap Cer SMD 100u 6.3V 20% 1206 X5R", Case / Package=1206, Manufacturer=AVX, Manufacturer Part Number=12066D107MAT2A, ClassName=Surface_Assy, ComponentLink1Description=Datasheet, ComponentLink1URL=http://datasheets.avx.com/cx5r.pdf?src-supplier=Digi-Key, PartStatus=Release, Prefered=false, Technology=SMT, User=balu
C36 C43: library part CMP-001-0000-2, "Cap Cer SMD 100p 50V 5% 0603 C0G", Case / Package=0603, Manufacturer=YAGEO, Manufacturer Part Number=CC0603J*NPO9BN101, ClassName=Surface_Assy, ComponentLink1Description=Datasheet, ComponentLink1URL=https://datasheet.ciiva.com/11786/0900766b8079c870-11786060.pdf, GPV_Number=1749.0055, PartStatus=Release, Prefered=false, Technology=SMT, User=zupa
D1 D2: library part CMP-001-1208-7, "LED Green LTST-C190KGKT 0603", Case / Package=0603, Manufacturer="Lite-On Inc", Manufacturer Part Number=LTST-C190KGKT, ClassName=Surface_Assy, GPV_Number=1602.0827, PartStatus=Release, Technology=SMT, User=epph
N1 N2: library part CMP-001-1317-2, "IC OPAMP JFET 3MHZ 8SOIC", Case / Package=SO8, Manufacturer="Texas Instruments", Manufacturer Part Number=TL072IDR, ClassName=Surface_Assy, ComponentLink1Description=Datasheet, ComponentLink1URL=http://www.ti.com/lit/ds/symlink/tl071a.pdf, GPV_Number=1500.5508, PartStatus=Release, Technology=SMT, User=zupa
PCB1: library part CMP-001-1147-4, "<PCB DesignName Revision>", ClassName=Symbol, GPV_Number=-, PartStatus=Release, Technology=SYM, User=balu
R1 R2 R3 R4 R5 R19 R20 R21 R22 R23: library part CMP-001-0316-3, "Res SMD 1M 1% 0.25W 1206", Case / Package=1206, Manufacturer=YAGEO, Manufacturer Part Number=RC1206FR-071ML, ClassName=Surface_Assy, ComponentLink1Description=Datasheet, ComponentLink1URL=https://datasheet.ciiva.com/11819/0900766b80c6630a-11819896.pdf, GPV_Number=1921.0180, MNL_Number=15310041, PartStatus=Release, Prefered=true, Technology=SMT, User=zupa
R6 R17: library part CMP-001-0240-3, "Res SMD 100R 1% 0.1W 0603", Case / Package=0603, Manufacturer=YAGEO, Manufacturer Part Number=RC0603FR-07100RL, ClassName=Surface_Assy, ComponentLink1Description=Datasheet, ComponentLink1URL=https://datasheet.ciiva.com/11808/0900766b80f96399-11808280.pdf, GPV_Number=1922.0102, MNL_Number=15310004, PartStatus=Release, Prefered=true, Technology=SMT, User=zupa
R7 R9 R10 R15 R18 R24 R26 R27: library part CMP-001-0250-3, "Res SMD 1k 1% 0.1W 0603", Case / Package=0603, Manufacturer=YAGEO, Manufacturer Part Number=RC0603FR-071KL, ClassName=Surface_Assy, ComponentLink1Description=Datasheet, ComponentLink1URL=https://datasheet.ciiva.com/11808/0900766b80f96399-11808280.pdf, GPV_Number=1922.0011, MNL_Number=15310012, PartStatus=Release, Prefered=true, Technology=SMT, User=zupa
R8 R16: library part CMP-001-0271-3, "Res SMD 47k 1% 0.1W 0603", Case / Package=0603, Manufacturer=YAGEO, Manufacturer Part Number=RC0603FR-0747KL, ClassName=Surface_Assy, ComponentLink1Description=Datasheet, ComponentLink1URL=https://datasheet.ciiva.com/11808/0900766b80f96399-11808280.pdf, GPV_Number=1922.0044, PartStatus=Release, Prefered=true, Technology=SMT, User=zupa
R11 R14: library part CMP-001-0580-3, "Res SMD 3k3 1% 0.1W 0603", Case / Package=0603, Manufacturer=YAGEO, Manufacturer Part Number=RT0603FRE073K3L, ClassName=Surface_Assy, ComponentLink1Description=Datasheet, ComponentLink1URL=https://datasheet.ciiva.com/7746/1392914-7746698.pdf, GPV_Number=1922.1554, PartStatus=Release, Prefered=true, Technology=SMT, User=napa
R12: library part CMP-001-0272-3, "Res SMD 47R 1% 0.1W 0603", Case / Package=0603, Manufacturer=YAGEO, Manufacturer Part Number=RC0603FR-0747RL, ClassName=Surface_Assy, ComponentLink1Description=Datasheet, ComponentLink1URL=https://datasheet.ciiva.com/11808/0900766b80f96399-11808280.pdf, GPV_Number=1922.0015, PartStatus=Release, Prefered=true, Technology=SMT, User=zupa
R13: library part CMP-001-0334-3, "Res SMD ?R? ?% 0.1W 0603", Manufacturer=?, ClassName=Surface_Assy, GPV_Number=?, Manufacturer Part Number=?, PartStatus=Draft, Technology=SMT, User=zupa
R25: library part CMP-001-0287-3, "Res SMD 0R 1% 0.125W 0805", Manufacturer=YAGEO, Manufacturer Part Number=RC0805JR-070RL, ClassName=Surface_Assy, ComponentLink1Description=Datasheet, ComponentLink1URL=https://datasheet.ciiva.com/11819/0900766b8106beab-11819430.pdf, GPV_Number=1930.0000, MNL_Number=15500000, PartStatus=Release, Prefered=true, Technology=SMT, User=zupa
R28 R29: library part CMP-001-0582-3, "Res SMD 5k1 1% 0.1W 0603", Case / Package=0603, Manufacturer=YAGEO, Manufacturer Part Number=RC0603FR-075K1L, ClassName=Surface_Assy, ComponentLink1Description=Datasheet, ComponentLink1URL=https://datasheet.ciiva.com/8895/pyu-rc0603-51-rohs-l-4-8895189.pdf, GPV_Number=1922.0144, PartStatus=Release, Prefered=true, Technology=SMT, User=napa
R30 R31: library part Lötpad_2mmx3mm, "Solderpad 2mm x 3mm", Case/Package=-, ClassName=Testpoint, Footprint_validated=No, GPV_Number=xxxx.xxxx, Manufacturer=-, Manufacturer Part Number=-, MNL_Number=xxxxxxxx, Part_validated=No, PartStatus=New, System=Connector, Technology=SMT
TP1 TP2 TP3 TP4 TP5 TP6 TP8 TP9 TP11 TP12 TP13 TP14: library part CMP-00087-1, "TestPoint 1.6mm with via v70h30", ClassName=Testpoint, GPV_Number=-, PartStatus=Release, Technology=SMT, User=epph
U1: "IC DC/DC Converter 5VIN +-9VOUT 1W", Case/Package=7-SIP, Manufacturer="XP Power", Supplier Part Number 1=1860943, ClassName=Through-Hole_Assy, Footprint_validated=No, GPV_Number=-, Manufacturer Part Number=IA0509S, MNL_Number=xxxxxxxx, Part_validated=No, PartStatus=New, Supplier 1=Farnell, System=-, Technology=THT
V1 V2 V3 V4: library part CMP-00074-1, "Diode Schottky 40V 1A SMA", Case / Package=SMA, Manufacturer=VISHAY, ClassName=Surface_Assy, GPV_Number=1600.1206, Manufacturer Part Number=SS14-E3, PartStatus=New, Technology=SMT, User=epph
V5: "IC REG 5V SOT-89-3", Case/Package=SOT-89-3, Manufacturer=ST, ClassName=Surface_Assy, Footprint_validated=No, GPV_Number=xxxx.xxxx, Manufacturer Part Number=L78L05, MNL_Number=xxxxxxxx, Part_validated=No, PartStatus=New, System=-, Technology=SMT
V6: "IC REG -5V SOT-89-3", Case/Package=SOT-89-3, Manufacturer=ST, ClassName=Surface_Assy, Footprint_validated=No, GPV_Number=xxxx.xxxx, Manufacturer Part Number=L79L05, MNL_Number=xxxxxxxx, Part_validated=No, PartStatus=New, System=-, Technology=SMT
X1: library part CMP-00068-3, "Anschlusspad mit 6mm Pad und 3.2mm Drill", ClassName=Testpoint, GPV_Number=-, Technology=SMT
X2: "EMI Shield 26.2mm x 26.2mm, soldered", Case/Package="0201 | 0402 | 0603 | 0805 | 1206 | SO8 | SO16 |", Manufacturer=Laird, ClassName="Surface_Assy | Testpoint | Through-Hole_Assy | NetTie | Symbol | Mechanical", Footprint_validated="Yes | No", GPV_Number=xxxx.xxxx, Manufacturer Part Number=BMI-S-103, MNL_Number=xxxxxxxx, Part_validated="Yes | No", PartStatus="New | Draft | Release", System=Connector, Technology="SMT | THT | SMT-BTC"
X3: "CONN USB-C 16pin", Case/Package=USB-C, Manufacturer=Molex, ClassName=Through-Hole_Assy, Footprint_validated=No, GPV_Number=xxxx.xxxx, Manufacturer Part Number=105450-0101, MNL_Number=xxxxxxxx, Part_validated=No, PartStatus=New, System=Connector, Technology=SMT
X4: "CONN RF SMA", Case/Package=SMA, Manufacturer=MOLEX, ClassName=Through-Hole_Assy, Footprint_validated=No, GPV_Number=xxxx.xxxx, Manufacturer Part Number=73251-2120, MNL_Number=xxxxxxxx, Part_validated=No, PartStatus=New, System=Connector, Technology=THT

## Free pads (board coordinates)
  round 0 hole 3.2 unplated: 11(9,14)

## Via types
v1: diameter 0.6, hole 0.3, Top Layer to Bottom Layer, tented both sides, 39 vias
v2: diameter 0.7, hole 0.3, Top Layer to Bottom Layer, 14 vias
v3: diameter 0.6, hole 0.3, Top Layer to Bottom Layer, 14 vias

## Nets (pads, with @x,y where several pads share a name; then routed paths per layer and width w, separated by ;. In a path a pad name is that pad's centre, name@x,y a point inside that pad or via, vN(x,y) a via of type N, cw(c..) or ccw(c..) an arc to the next point about the centre after c; other vN are vias at no path point)
5V: C26.2 C27.2 C32.1 C33.2 C34.2 C35.2 C36.2 N1.8 N2.8 R26.2 TP8.1 V1.2 V3.2 V5.1 | length 17.1
  Top Layer w0.5: v1(29.5,12.25) C26.2 ; N1.8 v1(34.905,12.685) ; v1(40,19.25) C32.1 ; v1(40.75,17.5) C34.2 ; V5.1 40.75,19.39 C32.1 ; R26.2 41.55,15.985 C34.2 ; N2.8 v1(45.435,7.345) ; v1(45,5.75) C27.2 ; C32.1 40.89,18.86 41.55,18.2 C34.2
  Bottom Layer w0.5: v1(40,19.25) C33.2 41.55,19.15 C35.2 C36.2
  other v2: 38.75,23.5
5V_USB: R25.1 X3.A4 X3.A9 X3.B4 X3.B9 | length 8
  Top Layer w0.2: R25.1 71.224,22 ; X3.A4 70.974,20.5 71.224,20.75 ; X3.A9 70.974,23.5 71.224,23.25 ; X3.B9 71.224,20.75 ; X3.B4 71.224,23.25 ; 71.224,20.75 71.224,22 ; 71.224,22 71.224,23.25
5Vin: C28.2 C29.2 R25.2 TP6.1 U1.1 | length 4.1
  Bottom Layer w0.5: U1.1 60.915,24.55 C28.2 62.85,24.45 C29.2
  other v1: 66,20.5 66,21.5 66,22.5 66,23.5
  other v2: 65,25.75
9V: C30.2 C31.2 U1.6 V5.3 | length 27
  Top Layer w0.5: V5.3 v2(44.75,21.5)
  MidLayer2 w1: v2(44.75,21.5) 45.75,22.5 53,22.5 58.75,16.75 58.75,14.015 U1.6
  Bottom Layer w0.5: C31.2 57,12.45 C30.2 60.315,12.45 U1.6
-5V: C26.1 C27.1 C39.2 C40.1 C41.1 C42.1 C43.1 N1.4 N2.4 R27.1 TP11.1 V2.1 V4.1 V6.3 | length 21.1
  Top Layer w0.5: C26.1 v1(29.5,15.75) ; v1(31.095,15.315) N1.4 ; C27.1 v1(48.5,5.75) ; v1(48.065,11.155) N2.4 ; R27.1 48.95,15.985 C41.1 ; v1(49.75,17.5) C41.1 ; V6.3 49.75,19.39 C39.2 ; v1(50.5,19.25) C39.2 ; C41.1 48.95,18.2 49.61,18.86 C39.2
  Bottom Layer w0.5: V4.1 v1(31.5,2) ; V2.1 v1(31.5,26) ; C43.1 48.95,16.01 C42.1 ; v1(49.75,17.5) C42.1 ; v1(50.5,19.25) C40.1 48.95,19.15 C42.1
  other v2: 51.25,16
-9V: C37.1 C38.1 U1.4 V6.2 | length 19.1
  Top Layer w1: 48.25,24.25 v2(50,24.25)
  MidLayer2 w1: v2(50,24.25) 53.595,24.25 U1.4
  Bottom Layer w0.5: C38.1 57,17.05 C37.1 60.405,17.05 U1.4
GND: C6.1 C11.1 C12.1 C13.2 C14.2 C24.1 C30.1 C31.1 C32.2 C33.1 C34.1 C35.1 C36.1 C37.2 C38.2 C39.1 C40.2 C41.2 C42.2 C43.2 D1.2 D2.1 N2.3 R10.2 R11.1 R14.2 TP12.1 TP14.1 U1.5 V5.2 V6.1 X2.S X4.2 | length 52.8
  Top Layer w0.2: R10.2 v1(42.5,13.5)
  Top Layer w0.5: R14.2 v1(22.5,14) R11.1 ; C13.2 v1(24,14) C11.1 ; C14.2 v1(25.5,14) C12.1 ; C24.1 v1(38,14) C6.1 ; V5.2 42.25,21.165 43.61,19.805 C32.2 ; D1.2 42.95,16.05 C34.1 ; v1(43.75,17.5) C34.1 ; v1(44.5,19.25) C32.2 ; v1(46,19.25) C39.1 ; v1(46.75,17.5) C41.2 ; V6.1 46.75,19.39 C39.1 ; D2.1 47.55,16.05 C41.2 ; v1(48.065,9.885) N2.3 ; v1(71.05,2.508) X4.2@74.05,2.508 ; v1(71.05,9.492) X4.2@74.05,9.492 ; C34.1 42.95,18.2 43.61,18.86 C32.2 ; C39.1 46.89,18.86 47.55,18.2 C41.2
  Bottom Layer w0.5: C36.1 C35.1 ; v1(43.75,17.5) C35.1 ; v1(44.5,19.25) C33.1 42.95,19.15 C35.1 ; v1(46,19.25) C40.2 47.55,19.15 C42.2 ; v1(46.75,17.5) C42.2 ; C43.2 47.55,16.01 C42.2 ; C31.1 57,14.05 C30.1 59.945,14.05 U1.5 59.855,15.45 C37.2 57,15.45 C38.2
  other v2: 21,14 45.25,16
  other v3: 34.5,1 40.5,1 46.5,1 53.5,1 27.5,8 53.5,8 27.5,14 53.5,14 27.5,20 53.5,20 34.5,27 40.5,27 46.5,27 53.5,27
GND_USB: C28.1 C29.1 R28.1 R29.1 TP9.1 U1.2 X3.A1 X3.A12 X3.B1 X3.B12 X3.S | length 22.1
  Top Layer w0.2: X3.A1 X3.B12 ; X3.A12 X3.B1
  Top Layer w0.5: X3.B12 v1(73.9,18.9) 75,20 75,21 ; X3.B1 v1(73.9,25.1) 75,24 75,23 ; v1(76.1,21) 75,21 ; v1(76.1,23) 75,23 ; 75,21 75,23
  Bottom Layer w0.5: U1.2 61.225,22.95 C28.1 62.85,23.05 C29.1 ; R29.1 v1(76.1,21) ; R28.1 v1(76.1,23)
  other v2: 68.25,25.75
LED_5V: D1.1 R26.1 | length 1.5
  Top Layer w0.5: R26.1 42.935,14.565 D1.1
LED_-5V: D2.2 R27.2 | length 1.5
  Top Layer w0.5: D2.2 47.565,14.565 R27.2
NetC1_1: C1.1 R1.1 R30.1 | length 6.1
  Top Layer w0.5: R30.1 1.89,20.64 C1.1
NetC1_2: C1.2 C2.1 R1.2 R2.1 | length 5.5
  Top Layer w0.5: C1.2 C2.1 6.14,24.015 R2.1 R1.2
NetC2_2: C2.2 C3.1 R2.2 R3.1 | length 5.5
  Top Layer w0.5: C2.2 C3.1 10.39,24.015 R3.1 R2.2
NetC3_2: C3.2 C4.1 R3.2 R4.1 | length 7.5
  Top Layer w0.5: C3.2 13.11,24.015 R3.2 14.5,22.625 R4.1 17.485,22.625 C4.1
NetC4_2: C4.2 C5.1 R4.2 R5.1 | length 7.1
  Top Layer w0.5: C5.1 17.235,17.875 R5.1 15,18.125 R4.2 15.015,19.89 C4.2
NetC5_2: C5.2 C7.2 C8.2 R5.2 R6.1 R8.2 TP1.1 V1.1 V2.2 | length 34.6
  Top Layer w0.2: v2(24,22.5) 25.5,22.5 26,23 R6.1
  Top Layer w0.5: R5.2 C5.2@17.235,15.125 ; C8.2 C7.2 22.515,20.7 R8.2 22.346,20.685 21.5,19.839 21.5,16.5 20.125,15.125 C5.2@17.235,15.125 ; C5.2@17.235,15.125 C5.2 C5.2@17.235,15.125
  Top Layer w0.75: C7.2 v2(24,22.5)
  Bottom Layer w1: v2(24,22.5) V1.1 V2.2 v1(24,26) v2(24,22.5)
NetC6_2: C6.2 N2.5 R7.2 R10.1 | length 10.5
  Top Layer w0.2: R7.2 38,18.185 C6.2 39.75,14.7 39.75,14.065 R10.1 42.66,11.155 N2.5
NetC7_1: C7.1 C9.2 C11.2 | length 2.6
  Top Layer w0.5: C11.2 24,17.95 C9.2 24,18.05 C7.1
NetC8_1: C8.1 C9.1 C12.2 | length 2.6
  Top Layer w0.5: C12.2 25.5,17.95 C9.1 25.5,18.05 C8.1
NetC10_1: C10.1 N1.2 R9.1 R13.2 | length 7.6
  Top Layer w0.2: R9.1 33.635,19.68 N1.2 33.635,15.365 34.315,14.685 R13.2
NetC10_2: C10.2 N1.1 R7.1 R9.2 TP2.1 | length 7.2
  Top Layer w0.2: N1.1 34.905,19.72 R9.2 34.935,19.935 v2(36.5,21.5) ; C10.2 R7.1
NetC13_1: C13.1 C15.2 C17.2 | length 2.6
  Top Layer w0.5: C17.2 24,9.95 C15.2 24,10.05 C13.1
NetC14_1: C14.1 C15.1 C18.2 | length 2.6
  Top Layer w0.5: C18.2 25.5,9.95 C15.1 25.5,10.05 C14.1
NetC16_1: C16.1 C24.2 N2.6 R15.1 R18.2 | length 8
  Top Layer w0.2: R18.2 R18.2@38,9.815 ; C24.2 R18.2@38,9.815 ; N2.6 42.565,9.885 C16.1 42.485,9.935 R15.1 38.12,9.935 R18.2@38,9.815
NetC16_2: C16.2 N2.7 R12.1 R15.2 TP3.1 | length 13.4
  Top Layer w0.2: v2(41.25,6) 41,6.25 R15.2 42.485,8.565 C16.2 42.565,8.615 N2.7 46.897,8.615 50.262,5.25 R12.1
NetC17_1: C17.1 C18.1 C23.2 R16.1 R17.1 R23.2 TP4.1 V3.1 V4.2 | length 34.6
  Top Layer w0.2: v2(24,5.5) 25.5,5.5 26,5 R17.1
  Top Layer w0.5: R23.2 C23.2@17.235,12.875 ; C23.2 C23.2@17.235,12.875 ; C18.1 C17.1 22.515,7.3 R16.1 22.346,7.315 21.5,8.161 21.5,11.5 20.125,12.875 C23.2@17.235,12.875
  Top Layer w0.75: v2(24,5.5) C17.1
  Bottom Layer w1: v1(24,2) v2(24,5.5) V3.1 V4.2 v1(24,2)
NetC19_1: C19.1 R19.1 R31.1 | length 6.1
  Top Layer w0.5: R31.1 1.89,7.36 C19.1
NetC19_2: C19.2 C20.1 R19.2 R20.1 | length 5.5
  Top Layer w0.5: C19.2 C20.1 6.14,3.985 R20.1 R19.2
NetC20_2: C20.2 C21.1 R20.2 R21.1 | length 5.5
  Top Layer w0.5: C20.2 C21.1 10.39,3.985 R21.1 R20.2
NetC21_2: C21.2 C22.1 R21.2 R22.1 | length 7.5
  Top Layer w0.5: C21.2 13.125,1.515 R21.2 14.5,5.375 R22.1 15.015,5.39 C22.1
NetC22_2: C22.2 C23.1 R22.2 R23.1 | length 7.1
  Top Layer w0.5: C23.1 17.235,10.125 R23.1 15,9.875 R22.2 17.485,8.125 C22.2
NetC25_1: C25.1 N1.6 R13.1 R24.1 | length 8.8
  Top Layer w0.2: R24.1 32.315,9.735 C25.1 32.365,9.815 N1.6 32.365,12.565 33.115,13.315 R13.1
NetC25_2: C25.2 N1.7 R18.1 R24.2 TP5.1 | length 8.3
  Top Layer w0.2: N1.7 33.635,9.815 C25.2 ; v2(35,6.5) 35,6.935 R24.2 33.685,9.735 C25.2 ; R18.1 C25.2
NetN1_3: N1.3 R6.2 | length 6.7
  Top Layer w0.2: R6.2 32.365,22.32 N1.3
NetN1_5: N1.5 R17.2 | length 6.6
  Top Layer w0.2: N1.5 31.095,7.405 31.685,6.815 R17.2
NetN2_1: N2.1 N2.2 | length 1.3
  Top Layer w0.5: N2.1 N2.2
NetR8_1: R8.1 R11.2 | length 2.6
  Top Layer w0.5: R11.2 R8.1
NetR12_2: R12.2 TP13.1 X4.1 | length 23.9
  Top Layer w0.2: R12.2 v1(52.5,5.25) ; v2(70.54,6) X4.1@75.25,6
  MidLayer2 w0.2: v1(52.5,5.25) 64.25,5.25 65,6 v2(70.54,6)
NetR14_1: R14.1 R16.2 | length 2.6
  Top Layer w0.5: R16.2 R14.1
NetR28_2: R28.2 X3.B5 | length 2
  Top Layer w0.2: X3.B5 72.75,22.75 v1(73,23)
  Bottom Layer w0.2: v1(73,23) R28.2
NetR29_2: R29.2 X3.A5 | length 5.2
  Top Layer w0.2: v1(69.6,21) X3.A5
  Bottom Layer w0.2: v1(69.6,21) R29.2
pads on no net: X1.1 X3.A2 X3.A3 X3.A6 X3.A7 X3.A8 X3.A10 X3.A11 X3.B2 X3.B3 X3.B6 X3.B7 X3.B8 X3.B10 X3.B11

## Polygon pours and split planes (outlines as drawn)
GND on MidLayer1 "GND_L02_P004" (solid, remove dead copper, pour order 4): 22.5,28 22.5,22.5 19.75,19.75 19.75,8.25 22.5,5.5 22.5,0 78,0 78,28
GND_USB on MidLayer1 "GND_USB_L02_P000" (solid, pour order 0): 78,28.005 59.01,28.005 59.01,21.99 60.495,20.505 64.745,20.505 68.745,16.505 78,16.505
-5V on MidLayer2 "-5V_L03_P006" (solid, remove dead copper, pour order 6): 22.5,28 22.5,18.5 19.75,15.75 19.75,12.25 22.5,9.5 22.5,0 78,0 78,28
5Vin on MidLayer2 "5VIN_L03_P001" (solid, pour order 1): 78,28 59,28 59,22 60.5,20.5 64.75,20.5 68.75,16.5 78,16.5
5Vin on Top Layer "5VIN_L01_P005" (solid, pour order 5): 66.75,20.25 66.5,20 65.75,20 65.5,20.25 65.5,23.75 65.75,24 66.5,24 66.75,23.75
5V on Bottom Layer "5V_L04_P007" (solid, remove dead copper, pour order 7): 22.5,28 22.5,18.5 19.75,15.75 19.75,12.25 22.5,9.5 22.5,0 78,0 78,28

## Other copper
Bottom Layer:
  pour cut-out: 78,28 57,28 57,21.25 59.75,18.5 66.75,18.5 70.75,14.5 78,14.5

## Silkscreen, mask and mechanical layers (free items; w line width, h text height)
Top Solder:
  drawing of 3 lines, arcs and shapes, not listed
Board:
  circle w0.1: c66.5,14 r1.6
  circle w0.1: c9,14 r1.6
  lines w0.1: 0,1 ccw(c1,1) 1,0 ; 0,1.003 0,12.247 ; 0,12.25 cw(c1,12.25) 1,13.25 ; 1.003,0 75.8,0 ccw(c75.8,1) 76.8,1 76.8,11.3 cw(c77.4,11.3) 77.4,11.9 ccw(c77.4,12.5) 78,12.5 78,27 ccw(c77,27) 77,28 1,28 ccw(c1,27) 0,27 0,15.75 ccw(c1,15.75) 1,14.75 3.75,14.75 cw(c3.75,14) 3.75,13.25 1.003,13.25 ; 2.243,9.949 cw(c2.437,10.674) 2.632,11.398 7.944,9.974 cw(c7.75,9.25) 7.556,8.526 2.243,9.949 ; 2.243,18.051 ccw(c2.437,17.326) 2.632,16.602 7.944,18.026 ccw(c7.75,18.75) 7.556,19.474 2.243,18.051 ; 6.75,5.75 cw(c6.75,6.5) 6.75,7.25 10.5,7.25 ccw(c10.5,7.75) 11,7.75 11,10 cw(c11.75,10) 12.5,10 12.5,7.75 cw(c10.5,7.75) 10.5,5.75 6.75,5.75 ; 6.75,20.75 cw(c6.75,21.5) 6.75,22.25 10.5,22.25 cw(c10.5,20.25) 12.5,20.25 12.5,18 cw(c11.75,18) 11,18 11,20.25 ccw(c10.5,20.25) 10.5,20.75 6.75,20.75 ; 17,2.5 cw(c17,3.25) 17,4 18.75,4 ccw(c18.75,4.5) 19.25,4.5 19.25,10.75 cw(c20,10.75) 20.75,10.75 20.75,4.5 cw(c18.75,4.5) 18.75,2.5 17,2.5 ; 17,24 cw(c17,24.75) 17,25.5 18.75,25.5 cw(c18.75,23.5) 20.75,23.5 20.75,17.25 cw(c20,17.25) 19.25,17.25 19.25,23.5 ccw(c18.75,23.5) 18.75,24 17,24
Mech_Add:
  circle w0.1: c9,14 r3.5
Drill Drawing:
  drawing of 417 lines, arcs and shapes, not listed
  text "Layer" at -95.48,19.429 h1.48
  text "Name" at -89.275,19.429 h1.48
  text "Material" at -77.281,19.429 h1.48
  text "Thickness" at -66.5,19.429 h1.48
  text "Constant" at -57.645,19.429 h1.48
  text "Gerber" at -49.446,19.429 h1.48
  text "Board Layer Stack" at -42.405,19.429 h1.48
  text "Top Overlay" at -89.275,16.461 h1.48
  text "GTO" at -49.446,16.461 h1.48
  text "Top Solder" at -89.275,13.493 h1.48
  text "Solder Resist" at -77.281,13.493 h1.48
  text "0.010mm" at -66.5,13.493 h1.48
  text "3.5" at -57.645,13.493 h1.48
  text "GTS" at -49.446,13.493 h1.48
  text "1" at -95.48,10.525 h1.48
  text "Top Layer" at -89.275,10.525 h1.48
  text "0.035mm" at -66.5,10.525 h1.48
  text "GTL" at -49.446,10.525 h1.48
  text "Dielectric1" at -89.275,7.557 h1.48
  text "FR-4 (7628)" at -77.281,7.557 h1.48
  text "0.180mm" at -66.5,7.557 h1.48
  text "4.2" at -57.645,7.557 h1.48
  text "Dielectric 2" at -89.275,4.588 h1.48
  text "FR-4 (7628)" at -77.281,4.588 h1.48
  text "0.180mm" at -66.5,4.588 h1.48
  text "4.2" at -57.645,4.588 h1.48
  text "2" at -95.482,1.62 h1.48
  text "MidLayer1" at -89.275,1.62 h1.48
  text "0.035mm" at -66.5,1.62 h1.48
  text "G1" at -49.446,1.62 h1.48
  text "Core" at -89.275,-1.348 h1.48
  text "0.710mm" at -66.5,-1.348 h1.48
  text "4.2" at -57.645,-1.348 h1.48
  text "3" at -95.48,-4.316 h1.48
  text "MidLayer2" at -89.275,-4.316 h1.48
  text "0.035mm" at -66.5,-4.316 h1.48
  text "G2" at -49.446,-4.316 h1.48
  text "Dielectric 3" at -89.275,-7.284 h1.48
  text "FR-4 (7628)" at -77.281,-7.284 h1.48
  text "0.180mm" at -66.5,-7.284 h1.48
  text "4.2" at -57.645,-7.284 h1.48
  text "Dielectric 4" at -89.275,-10.252 h1.48
  text "FR-4 (7628)" at -77.281,-10.252 h1.48
  text "0.180mm" at -66.5,-10.252 h1.48
  text "4.2" at -57.645,-10.252 h1.48
  text "4" at -95.48,-13.22 h1.48
  text "Bottom Layer" at -89.275,-13.22 h1.48
  text "0.035mm" at -66.5,-13.22 h1.48
  text "GBL" at -49.446,-13.22 h1.48
  text "Bottom Solder" at -89.275,-16.188 h1.48
  text "Solder Resist" at -77.281,-16.188 h1.48
  text "0.010mm" at -66.5,-16.188 h1.48
  text "3.5" at -57.645,-16.188 h1.48
  text "GBS" at -49.446,-16.188 h1.48
  text "Bottom Overlay" at -89.275,-19.156 h1.48
  text "GBO" at -49.446,-19.156 h1.48
  text "Total board thickness:" at -95.48,-22.124 h1.48
  text "1.590mm" at -66.5,-22.124 h1.48
  text "Symbol" at -64.399,-54.982 h1.83
  text "Count" at -56.775,-54.982 h1.83
  text "Hole Size" at -49.897,-54.982 h1.83
  text "Hole Length" at -34.898,-54.982 h1.83
  text "Plated" at -20.637,-54.982 h1.83
  text "Hole Type" at -14.064,-54.982 h1.83
  text "Drill Layer Pair" at -4.545,-54.982 h1.83
  text "Via/Pad" at 13.808,-54.982 h1.83
  text "Pad Shape" at 21.5,-54.982 h1.83
  text "67" at -56.775,-58.133 h1.52
  text "0.300mm (11.81mil)" at -49.897,-58.133 h1.52
  text "-" at -34.898,-58.133 h1.52
  text "PTH" at -20.637,-58.133 h1.52
  text "Round" at -14.064,-58.133 h1.52
  text "Top Layer - Bottom Layer" at -4.545,-58.133 h1.52
  text "Via" at 13.808,-58.133 h1.52
  text "Rounded" at 21.5,-58.133 h1.52
  text "2" at -56.775,-61.283 h1.52
  text "0.600mm (23.62mil)" at -49.897,-61.283 h1.52
  text "1.600mm (62.99mil)" at -34.898,-61.283 h1.52
  text "PTH" at -20.637,-61.283 h1.52
  text "Slot" at -14.064,-61.283 h1.52
  text "Top Layer - Bottom Layer" at -4.545,-61.283 h1.52
  text "Pad" at 13.808,-61.283 h1.52
  text "Rounded" at 21.5,-61.283 h1.52
  text "2" at -56.775,-64.433 h1.52
  text "0.600mm (23.62mil)" at -49.897,-64.433 h1.52
  text "2.100mm (82.68mil)" at -34.898,-64.433 h1.52
  text "PTH" at -20.637,-64.433 h1.52
  text "Slot" at -14.064,-64.433 h1.52
  text "Top Layer - Bottom Layer" at -4.545,-64.433 h1.52
  text "Pad" at 13.808,-64.433 h1.52
  text "Rounded" at 21.5,-64.433 h1.52
  text "5" at -56.775,-67.584 h1.52
  text "0.800mm (31.50mil)" at -49.897,-67.584 h1.52
  text "-" at -34.898,-67.584 h1.52
  text "PTH" at -20.637,-67.584 h1.52
  text "Round" at -14.064,-67.584 h1.52
  text "Top Layer - Bottom Layer" at -4.545,-67.584 h1.52
  text "Pad" at 13.808,-67.584 h1.52
  text "(Mixed)" at 21.5,-67.584 h1.52
  text "1" at -56.775,-70.734 h1.52
  text "3.200mm (125.98mil)" at -49.897,-70.734 h1.52
  text "-" at -34.898,-70.734 h1.52
  text "NPTH" at -20.637,-70.734 h1.52
  text "Round" at -14.064,-70.734 h1.52
  text "Top Layer - Bottom Layer" at -4.545,-70.734 h1.52
  text "Pad" at 13.808,-70.734 h1.52
  text "Rounded" at 21.5,-70.734 h1.52
  text "1" at -56.775,-73.884 h1.52
  text "3.200mm (125.98mil)" at -49.897,-73.884 h1.52
  text "-" at -34.898,-73.884 h1.52
  text "PTH" at -20.637,-73.884 h1.52
  text "Round" at -14.064,-73.884 h1.52
  text "Top Layer - Bottom Layer" at -4.545,-73.884 h1.52
  text "Pad" at 13.808,-73.884 h1.52
  text "Rounded" at 21.5,-73.884 h1.52
  text "78 Total" at -56.775,-77.034 h1.52
  text "Slot definitions :" at -64.399,-79.24 h1.52
  text "Routed Path Length" at -52.984,-79.24 h1.52
  text "= Calculated from tool start centre position to tool end centre position." at -39.309,-79.24 h1.52
  text "Hole Length" at -52.984,-80.5 h1.52
  text "= Routed Path Length + Tool Size = Slot length as defined in the PCB layout" at -44.372,-80.5 h1.52